# Altium PCB DC.PcbDoc
Units mm, origin at the board's own origin, x right, y up, seen from the top; angles counter-clockwise.
Board outline 75 x 23.49 mm, 2 copper layers (Top Layer, Bottom Layer); 12 components, 2 nets, 34 pads, 96 vias.
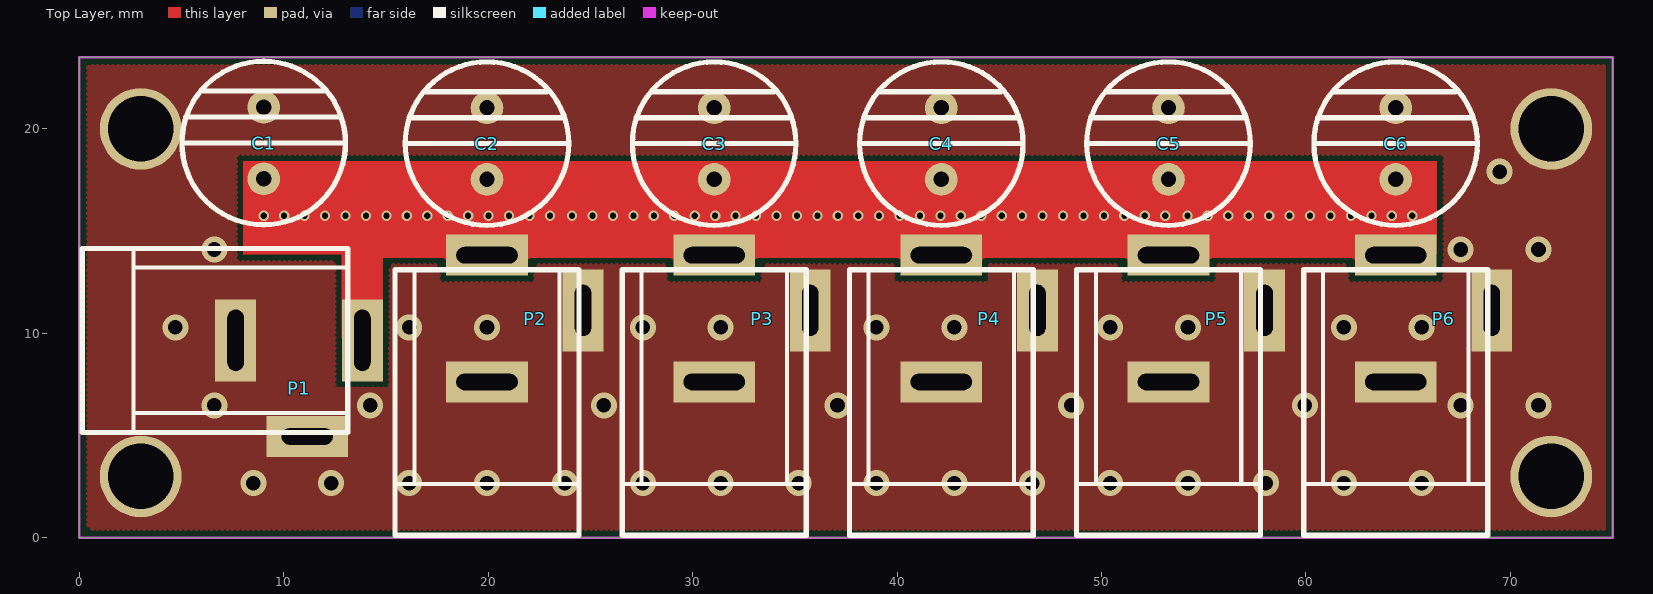
[diagram p0: Top Layer view]
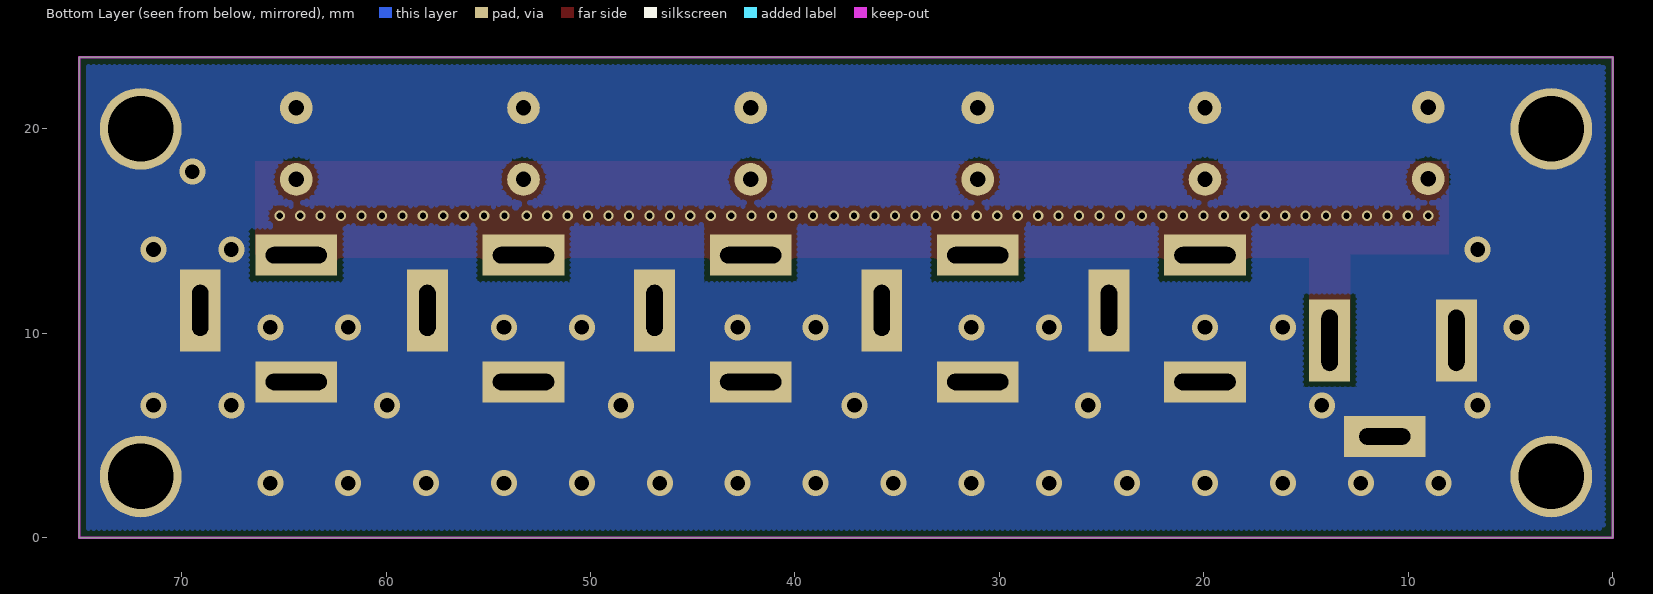
[diagram p1: Bottom Layer view, seen from below]
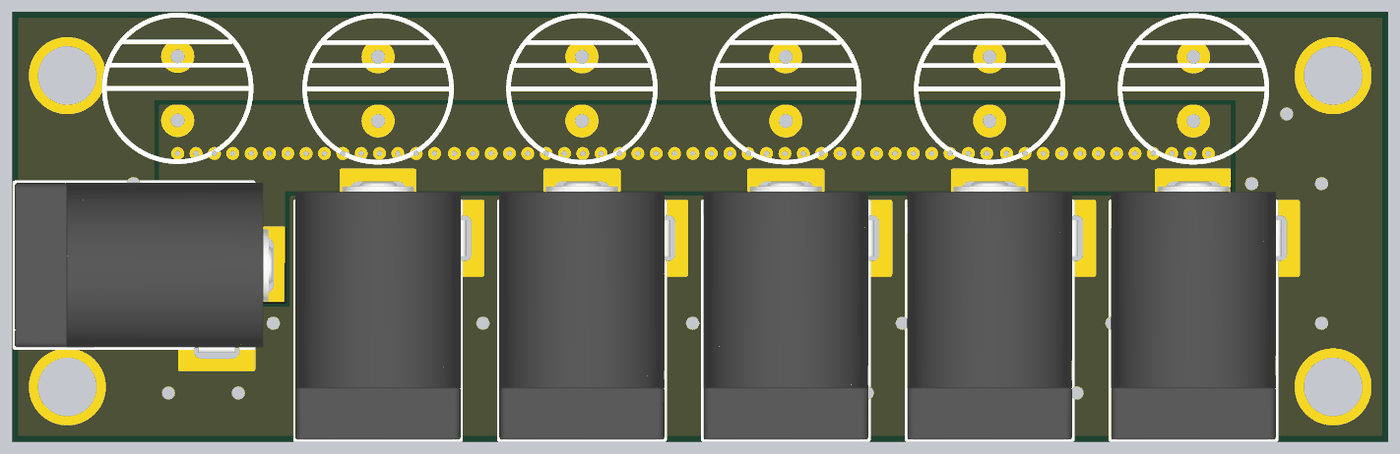
[diagram p2: 3D render of the assembled board from above, using the file's embedded part models]

## Layer stack, top to bottom
Top Solder: solder mask 0.0102, Solder Resist, Dk 3.5
Top Layer: signal copper 0.0356
Dielectric 1: dielectric 0.32, FR-4, Dk 4.8
Bottom Layer: signal copper 0.0356
Bottom Solder: solder mask 0.0102, Solder Resist, Dk 3.5

## Board outline
0,0 0,23.495 75,23.495 75,0

## Design rules (kind name [scope] priority, off if disabled: settings)
Clearance [All] p1: gap=0.254
PolygonConnect [All] p1: connectstyle=Direct reliefconductorwidth=0.254 reliefentries=4 polygonreliefangle="90 Angle" airgapwidth=0.254
RoutingVias [All] p1: holewidth=0.711 width=1.27 viastyle="Through Hole" minholewidth=0.711 minwidth=1.27 maxholewidth=0.711 maxwidth=1.27
SolderMaskExpansion [All] p1: expansion=0.102
Width [All] p1: maxlimit=0.254 minlimit=0.254 preferedwidth=0.254
30 further rules are at their usual default settings.

## Classes and differential pairs
component class Sheet1: C1 C2 C3 C4 C5 C6 P1 P2 P3 P4 P6

## Components (designator, comment, footprint, x,y, rotation, side; value= is the part's Value field where it differs from the comment)
C1 "CAP" 8X12_CAP 9.017,19.304 r90 top
C2 "CAP" 8X12_CAP 19.939,19.276 r90 top
C3 "CAP" 8X12_CAP 31.051,19.276 r90 top
C4 "CAP" 8X12_CAP 42.164,19.276 r90 top
C5 "CAP" 8X12_CAP 53.276,19.276 r90 top
C6 "CAP" 8X12_CAP 64.389,19.276 r90 top
P1 "Header 3" DC-005 7.643,9.652 r180 top
P2 "Header 3" DC-005 19.939,7.62 r270 top
P3 "Header 3" DC-005 31.051,7.62 r270 top
P4 "Header 3" DC-005 42.164,7.62 r270 top
P5 "Header 3" DC-005 53.276,7.62 r270 top
P6 "Header 3" DC-005 64.389,7.62 r270 top

## Footprints (in the part's own frame and the unit in brackets; to place one, negate y for a bottom-side part, rotate by r counter-clockwise, add the part's x,y. Pads: shape width x height; smd on the part's side, far side on the other; paste and mask are expansions set on the pad)
8X12_CAP [mm]
  round 1.6 hole 0.75: 1(-1.75,0) 2(1.75,0)
  silkscreen extent -4,-4 4,4
DC-005 [mm] "5.5*2.1mm，DC30V,2.5A"
  rect 2x4 hole 0.8 slot 3 at 90 deg: 1(-6.2,0) 2(0,0)
  rect 4x2 hole 0.8 slot 2.5 at 0 deg: 3(-3.5,4.7)
  silkscreen extent -5.48,-4.5 7.5,4.5, body extent -6.55,-4.5 7.5,4.8, height 11.2

## Part data
P1 P2 P3 P4 P5 P6: "Header, 3-Pin"

## Free pads (board coordinates)
  round 4 hole 3.2: 0(3,20) 2(3,3) 3(72,3) 4(72,20)

## Via types
v1: diameter 0.5, hole 0.3, Top Layer to Bottom Layer, 57 vias
v2: diameter 1.27, hole 0.711, Top Layer to Bottom Layer, tented both sides, 39 vias

## Nets (pads, with @x,y where several pads share a name; then routed paths per layer and width w, separated by ;. In a path a pad name is that pad's centre, name@x,y a point inside that pad or via, vN(x,y) a via of type N, cw(c..) or ccw(c..) an arc to the next point about the centre after c; other vN are vias at no path point)
GND: C1.2 C2.2 C3.2 C4.2 C5.2 C6.2 P1.2 P1.3 P2.2 P2.3 P3.2 P3.3 P4.2 P4.3 P5.2 P5.3 P6.2 P6.3 pad.0 pad.2 pad.3 pad.4
  other v2: 8.509,2.667 12.319,2.667 16.129,2.667 19.939,2.667 23.749,2.667 27.559,2.667 31.369,2.667 35.179,2.667 38.989,2.667 42.799,2.667 46.609,2.667 50.419,2.667 54.229,2.667 58.039,2.667 61.849,2.667 65.659,2.667 6.604,6.477 14.224,6.477 25.654,6.477 37.084,6.477 48.514,6.477 59.944,6.477 67.564,6.477 71.374,6.477 4.699,10.287 16.129,10.287 19.939,10.287 27.559,10.287 31.369,10.287 38.989,10.287 42.799,10.287 50.419,10.287 54.229,10.287 61.849,10.287 65.659,10.287 6.604,14.097 67.564,14.097 71.374,14.097 69.469,17.907
VCC_+12V: C1.1 C2.1 C3.1 C4.1 C5.1 C6.1 P1.1 P2.1 P3.1 P4.1 P5.1 P6.1 | length 89.5
  Top Layer w0.254: C1.1 10.386,17.554 ; P1.1 13.843,13.335 ; C3.1 P3.1 ; C4.1 P4.1 ; C5.1 P5.1 ; C6.1 P6.1 P5.1 ; 10.386,17.554 13.843,14.097 13.843,13.335 ; 10.386,17.554 19.911,17.554 C2.1 P2.1 ; 13.843,13.335 14.328,13.82 P2.1 ; P2.1 P3.1 ; P3.1 P4.1 ; P4.1 P5.1
  other v1: 9.017,15.748 10.017,15.748 11.017,15.748 12.017,15.748 13.017,15.748 14.017,15.748 15.017,15.748 16.017,15.748 17.017,15.748 18.017,15.748 19.017,15.748 20.017,15.748 21.017,15.748 22.017,15.748 23.017,15.748 24.1,15.748 25.1,15.748 26.1,15.748 27.1,15.748 28.1,15.748 29.1,15.748 30.1,15.748 31.1,15.748 32.1,15.748 33.1,15.748 34.1,15.748 35.1,15.748 36.1,15.748 37.1,15.748 38.1,15.748 39.116,15.748 40.116,15.748 41.116,15.748 42.116,15.748 43.116,15.748 44.116,15.748 45.116,15.748 46.116,15.748 47.116,15.748 48.116,15.748 49.116,15.748 50.116,15.748 51.116,15.748 52.116,15.748 53.116,15.748 54.199,15.748 55.199,15.748 56.199,15.748 57.199,15.748 58.199,15.748 59.199,15.748 60.199,15.748 61.199,15.748 62.199,15.748 63.199,15.748 64.199,15.748 65.199,15.748

## Polygon pours and split planes (outlines as drawn)
GND on Top Layer "GND_L01_P000" (hatched 90Degree grid 0 track 0.254, remove dead copper, pour order 0): 75,0 75,23.495 0,23.495 0,0
GND on Bottom Layer "GND_L02_P002" (hatched 90Degree grid 0 track 0.254, remove dead copper, pour order 2): 0,0 0,23.495 75,23.495 75,0

## Keep-outs
Keep-Out Layer:
  the board outline again, w0.127

## Other copper
Top Layer:
  rectangle net VCC_+12V: 12.827,9.779 14.859,15.113
  rectangle net VCC_+12V: 8.001,13.843 66.421,18.415

## Silkscreen, mask and mechanical layers (free items; w line width, h text height)
Drill Drawing:
  text ".Lengend" at 76.581,0.381 h1